# Altium PCB Glog 5G_V1.PcbDoc (part 3 of 3)
Units mil, origin at the board's own origin, x right, y up, seen from the top; angles counter-clockwise.
Board outline 2165.35 x 3838.58 mil, 4 copper layers (Top Layer, GND, PWR, Bottom Layer); 183 components, 150 nets, 767 pads, 1532 vias.
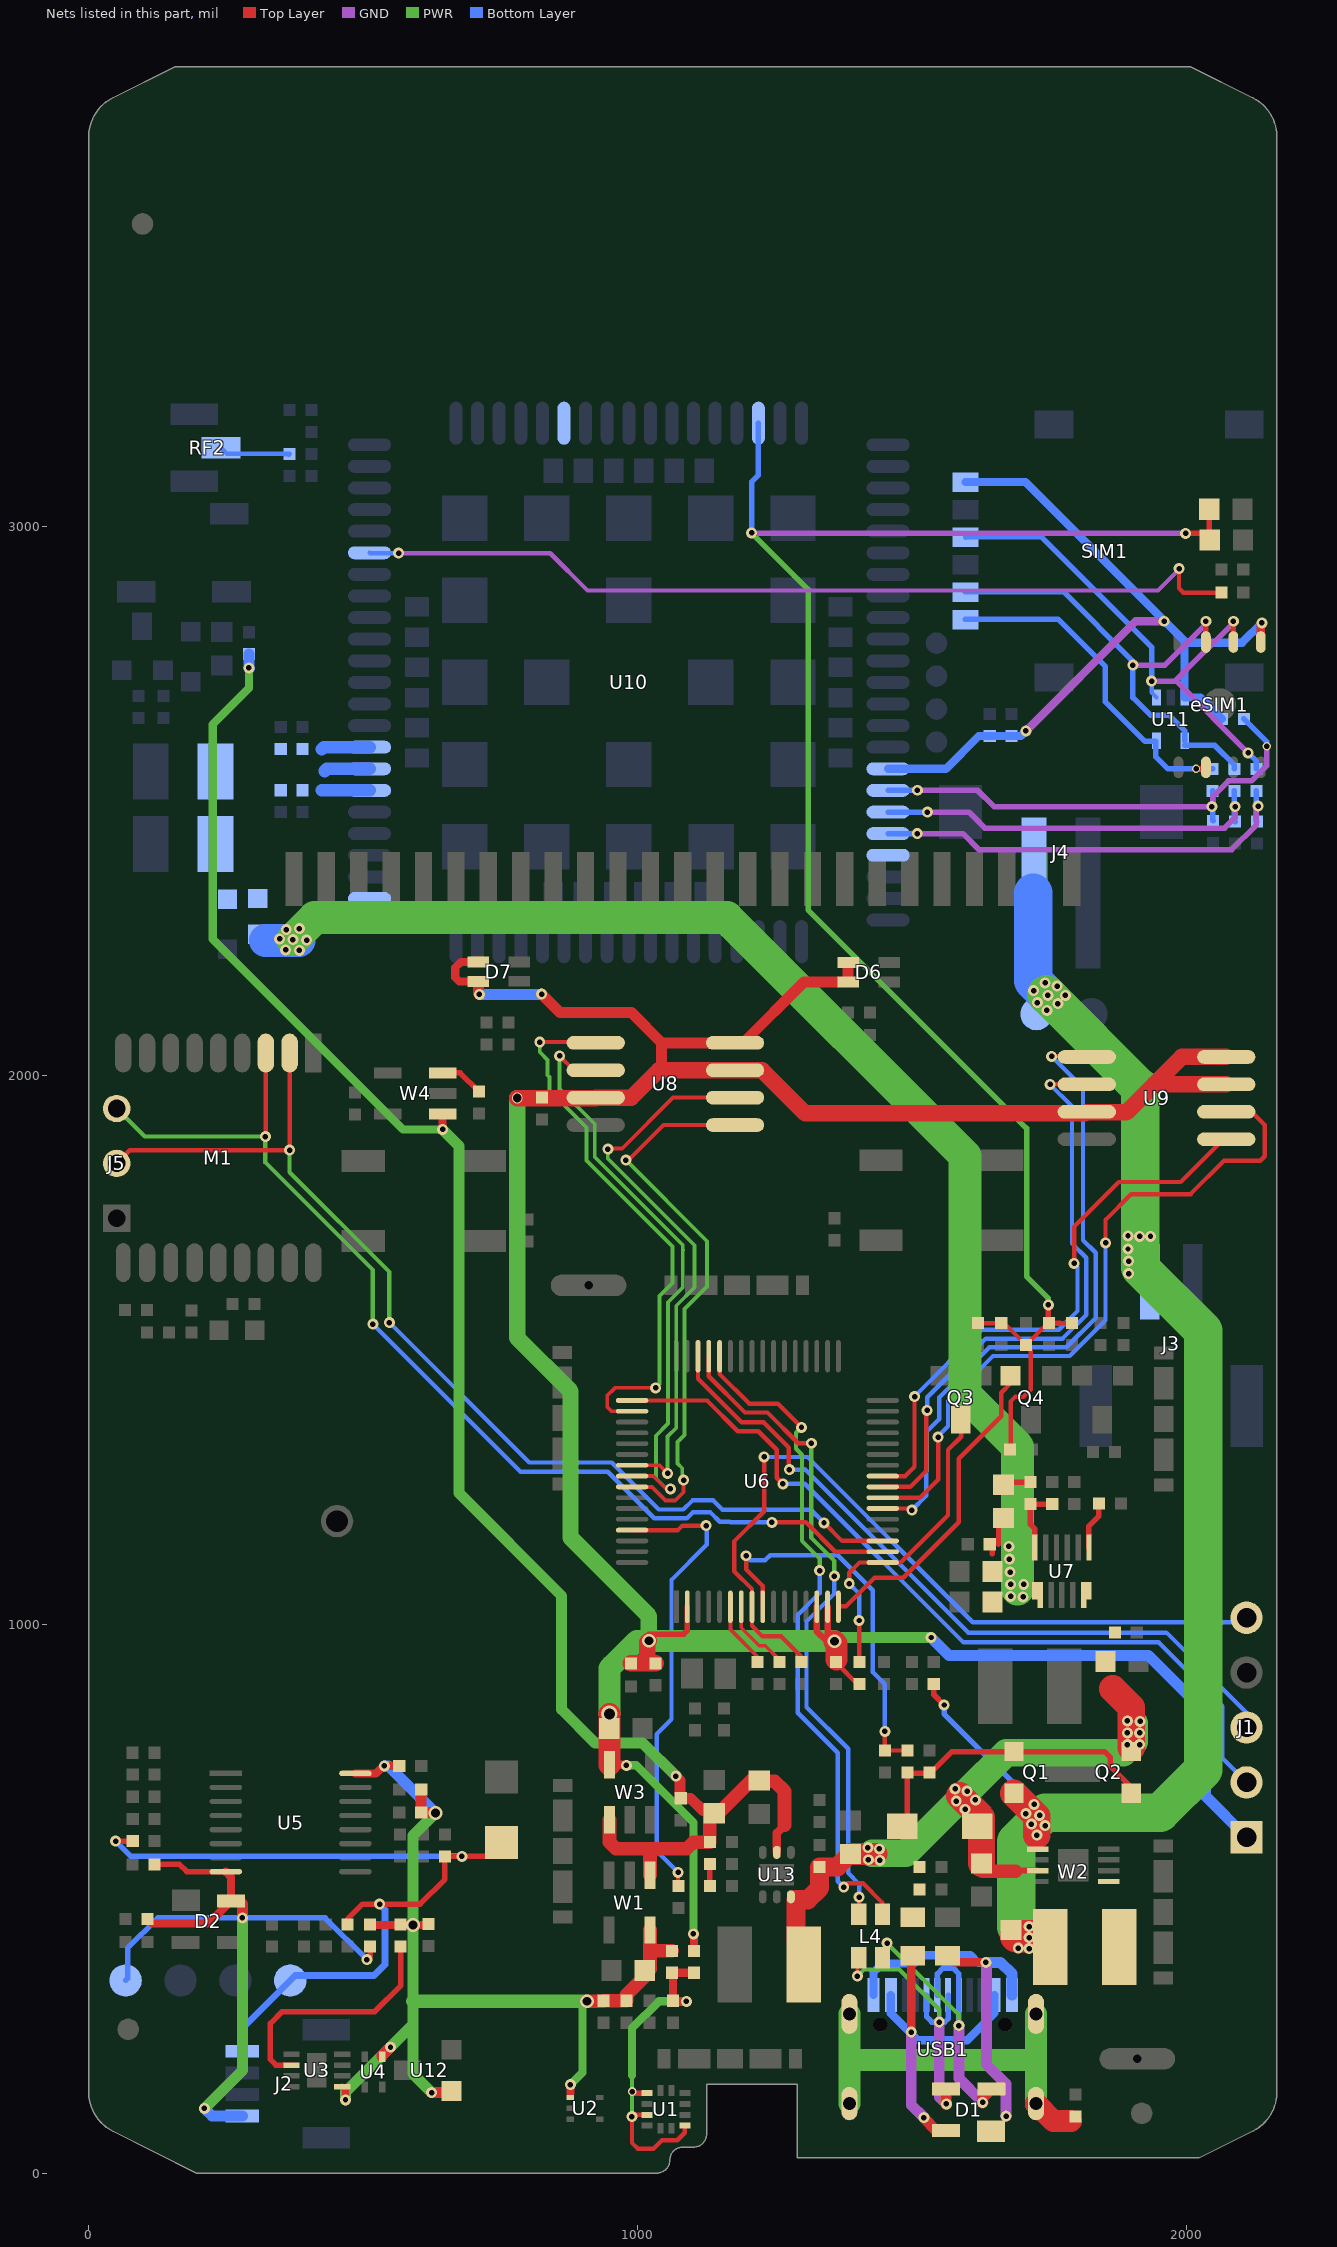
[diagram p5: the nets of this part, all layers, seen from the top]

## Via types
v1: diameter 20, hole 10, Top Layer to Bottom Layer, tented both sides, 1511 vias
v2: diameter 15, hole 10, Top Layer to Bottom Layer, tented both sides, 7 vias
v3: diameter 25, hole 16, Top Layer to Bottom Layer, tented both sides, 5 vias
v4: diameter 16, hole 10, Top Layer to Bottom Layer, tented both sides, 4 vias
v5: diameter 12, hole 10, Top Layer to Bottom Layer, tented both sides, 3 vias
v6: diameter 30, hole 20, Top Layer to Bottom Layer, tented both sides, 1 vias
v7: diameter 20, hole 16, Top Layer to Bottom Layer, tented both sides, 1 vias

## Nets (pads, with @x,y where several pads share a name; then routed paths per layer and width w, separated by ;. In a path a pad name is that pad's centre, name@x,y a point inside that pad or via, vN(x,y) a via of type N, cw(c..) or ccw(c..) an arc to the next point about the centre after c; other vN are vias at no path point) (continued)
NetR28_1: R28.1 R29.2 | length 58.9
  Top Layer w10: R28.1@1659,1254.31 1663.69,1259 R29.2@1716,1259
NetR29_1: R29.1 R30.2 U7.6 | length 122.7
  Top Layer w10: U7.6@1724.41,1139.78 1724.41,1174 1716,1182.41 R29.1@1716,1219 R30.2@1756,1219
NetR32_1: R32.1 U7.1 | length 87.7
  Top Layer w10: U7.1@1822.83,1139.78 1822.83,1178.83 1841,1197 R32.1@1841,1220
NetR40_1: R40.1 W4.3 | length 80.1
  Top Layer w10: W4.3@645,2005 677,2005 R40.1@711,1971
NetR60_2: R60.2 RF2.1 | length 146.9
  Bottom Layer w8.5: RF2.1@241,3144.02 252.02,3133 347.71,3133 ; R60.2@365,3132 cw(c365,3282) 347.71,3133 ; R60.2@366,3133 347.71,3133
NetR62_1: R62.1 U3.2 | length 446.3
  Top Layer w10: U3.2@369.56,196.85 341.15,196.85 331,207 331,273 352,294 521,294 569,342 R62.1@569,413
NetR64_1: R64.1 R65.1 | length 40
  Top Layer w10: R65.1@1132,523 1132,559 R64.1@1132,563
NRST: C30.1 J1.5 U6.8 | length 1480.2
  Top Layer w8: v1(1231,1305) 1231,1206 1176.13,1151.13 1176.13,1096.87 1208.8,1064.2 U6.8@1208.8,1032 1208.8,997.2 1228,978 1262,978 1299,941 C30.1@1299,931 ; J1.5@2106,1016 J1.5@2110,1012
  Bottom Layer w8: v1(1231,1305) 1231.13,1304.87 1310.13,1304.87 1611,1004 2102,1004 J1.5@2110,1012
PF0: R59.2 U6.6 | length 121.5
  Top Layer w7: U6.6@1169.43,1032 1169.43,990.57 1219,941 R59.2@1219,931
PF1: R26.2 U6.7 | length 136.4
  Top Layer w7: U6.7@1189.11,1032 1189.11,993.89 1222,961 1233,961 1259,935 R26.2@1259,931
PGND: C1.1 USB1.1 USB1.2 USB1.3 USB1.4 | length 857.1
  Top Layer w40: USB1.3@1726.38,126.68 1758.06,95 C1.1@1790,95
  PWR w40: USB1.4@1386.22,126.68 1386.22,209 ; USB1.2@1386.22,290.06 1386.22,209 ; USB1.3@1726.38,126.68 1726.38,206 ; USB1.1@1726.38,290.05 1726.38,206 ; 1386.22,209 1389.22,206 1726.38,206
  Bottom Layer w30: USB1.3@1726.38,126.68 1726.38,238.87
PT100_V-: J2.1 pad.10@367.35,351.06 R9.2 R12.2 R13.1 R61.1 | length 1510.4
  Top Layer w10: v1(49,605) 49.12,605.12 R12.2@80.24,605.12 ; R61.1@472,453 472,463 499,490 v1(530,490) 604,490 649,535 R13.1@649,577 v1(680,577) 726.19,577 R9.2@752,602.81
  Bottom Layer w10: v1(49,605) 77,577 v1(680,577)
  Bottom Layer w12: J2.1@280,222 280,263.71 376.29,360 520,360 540,380 540,480 v1(530,490)
SIM_CLK: eSIM1.C3 R52.2 SIM1.C3 U11.4 | length 885.6
  Top Layer w10: eSIM1.C3@2036,2790.17 v1(2036,2828)
  GND w10: v1(1903,2748) 1961,2748 2039,2826 2038,2826 v1(2036,2828)
  Bottom Layer w10: SIM1.C3@1597.73,2881.89 1776.11,2881.89 1903,2755 v1(1903,2748) ; v1@1903,2749 v1(1903,2748) ; U11.4@1997,2602 2052,2602 2088,2566 R52.2@2088,2559 ; U11.4@1997.18,2610 1997.18,2628.82 1969,2657 1935,2657 1903,2689 v1(1903,2748)
SIM_CLK_M: C44.2 R52.1 U10.32 | length 728.7
  GND w10: v1(1528.22,2480) 1604,2480 1633,2451 2070,2451 2089,2470 v1(2089,2490)
  Bottom Layer w10: U10.32@1456.69,2480.32 1527.91,2480.32 v1(1528.22,2480) ; R52.1@2088,2519 2088,2464 C44.2@2089,2463
SIM_DAT: eSIM1.C7 R53.2 SIM1.C7 U11.5 | length 636.4
  Top Layer w10: v2(2018,2559) 2033.17,2559 eSIM1.C7@2036,2561.83
  Bottom Layer w10: SIM1.C7@1597.73,2831.89 1766.11,2831.89 1852.87,2745.13 1852.87,2681.13 1925,2609 1945,2609 1945,2581 1967,2559 v2(2018,2559) R53.2@2048,2559
SIM_DAT_M: C46.2 R51.2 R53.1 U10.31 | length 902.3
  GND w10: v1(1510,2520) 1620,2520 1650,2490 2048,2490 2048,2508 2077,2537 2119,2537 2147,2565 v2(2147,2600)
  Bottom Layer w10: U10.31@1456.69,2519.69 1509.69,2519.69 v1(1510,2520) ; R53.1@2048,2519 2048,2465 C46.2@2049,2464 ; R51.2@2105,2650 2147,2608 v2(2147,2600)
  other v1: 2047,2490
SIM_DET_M: U10.34
SIM_RST: eSIM1.C2 R50.2 SIM1.C2 U11.1 | length 977.7
  Top Layer w10: eSIM1.C2@2086,2790.17 v1(2086,2828)
  GND w10: v1(1937,2719) 1980,2719 ; v1(2086,2828) 2086,2825 1980,2719 ; v1(2113,2588) 1982,2719 1980,2719
  Bottom Layer w8: SIM1.C2@1597.73,2981.89 SIM1.C2@1598.89,2981.89 ; v1(1937,2719) 1937,2698 U11.1@1946,2689
  Bottom Layer w10: SIM1.C2@1598,2981 1598.89,2981.89 1736.11,2981.89 1937,2781 v1(1937,2719) ; v1@2113,2586 v1(2113,2588) 2128,2573 2128,2571 R50.2@2128,2559
SIM_RST_M: C43.2 R50.1 U10.33 | length 792.4
  GND w10: v1(1509.95,2440.95) 1593.05,2440.95 1622,2412 2083,2412 2128,2457 v1@2128,2491
  Bottom Layer w10: U10.33@1456.69,2440.95 v1(1509.95,2440.95) ; R50.1@2128,2519 2128,2464 C43.2@2129,2463
  other v1: 2131,2491
SIM_VDD: C49.1 C50.2 eSIM1.C1 R51.1 SIM1.C1 U10.30 U11.3 | length 1513.7
  Top Layer w15: eSIM1.C1@2136,2790.17 2136,2823 v1(2138,2825)
  GND w15: v1(1708,2628) 1908,2828 v1(1960,2828)
  Bottom Layer w15: U10.30@1456.69,2559.06 1562.06,2559.06 1622,2619 C49.1@1642,2619 C50.2@1682,2619 1699,2619 v1(1708,2628) ; SIM1.C1@1597.73,3081.89 1707.11,3081.89 1997.18,2791.82 ; R51.1@2065,2650 2026,2689 U11.3@1997.18,2689 1997.18,2791.82 ; v1(2138,2825) 2102,2789 2000,2789 1997.18,2791.82
SPI0_MISO: U6.24 U9.2 | length 1093.1
  Top Layer w8: U6.24@1446.98,1250.5 1497.5,1250.5 1526,1279 1526,1388 v1(1528,1390) ; v1(1752,1984) U9.2@1819,1984
  Bottom Layer w8: v1(1528,1390) 1528,1413.9 1634.85,1520.75 1774.85,1520.75 1818,1563.9 1818,1668 1792,1694 1792,1944 v1(1752,1984)
SPI0_MOSI: U6.25 U9.5 | length 1076.9
  Top Layer w8: U6.25@1446.98,1270.19 1488.19,1270.19 1505,1287 v1(1505,1415) ; v1(1796,1658) 1796,1725 1877,1806 1990,1806 U9.5@2068,1884 ; U9.5@2045,1884 U9.5@2068,1884 ; U9.5@2072.94,1884 U9.5@2068,1884
  Bottom Layer w8: v1(1505,1415) 1626.62,1536.62 1767.62,1536.62 1802,1571 1802,1652 v1(1796,1658)
SPI0_NSS: U6.22 U9.1 | length 1201.1
  Top Layer w7: U6.22@1446.98,1211.13 1496.87,1211.13 v1(1500,1208)
  Top Layer w8: v1(1755,2035) 1818,2035 U9.1@1819,2034 ; U9.1@1851,2035 U9.1@1852,2034
  Bottom Layer w8: v1(1500,1208) 1526,1234 1526,1349.93 1550.13,1374.06 1550.13,1413.58 1641.42,1504.87 1781.42,1504.87 1835,1558.45 1835,1677 1812,1700 1812,1978 v1(1755,2035)
SPI0_SCK: U6.23 U9.6 | length 1270.6
  Top Layer w8: U6.23@1446.98,1230.82 1514.82,1230.82 1548,1264 v1(1548,1341) ; v1(1853,1695) 1853,1737 1900,1784 2008,1784 2069,1845 2135,1845 2143,1853 2143,1910 2119,1934 U9.6@2072.94,1934
  Bottom Layer w8: v1(1548,1341) v1@1549,1342 ; v1@1548,1343 1566,1361 1566,1407 1648,1489 1788,1489 1853,1554 v1(1853,1695)
SPI1_MISO: U6.56 U8.2 | length 1074.1
  Top Layer w7: v1(858,2036) 884.2,2009.8 U8.2@923.94,2009.8 ; U6.56@990.29,1270.19 1028.81,1270.19 1052,1247 v1(1060,1247)
  PWR w7: v1(858,2036) 858,1975.78 922.25,1911.53 922.25,1851.49 1082.63,1691.11 1082.63,1682.37 ; v1(1060,1247) 1052.77,1247 1033.63,1266.15 1033.63,1343.63 1055.87,1365.87 1055.87,1586.84 1082.63,1613.59 1082.63,1682.37 ; 1083,1682 1082.63,1682.37
SPI1_MOSI: U6.57 U8.5 | length 1029.4
  Top Layer w7: v1(979,1846) 984,1846 1047.8,1909.8 U8.5@1177.88,1909.8 ; U6.57@990.29,1250.5 1026.5,1250.5 1038.63,1238.37 1038.63,1238.15 1051.15,1225.63 1068.85,1225.63 1084,1240.77 v1(1084,1263)
  PWR w7: v1(979,1846) 1127,1698 1127,1615.9 1085.62,1574.52 1085.62,1345.3 1072.75,1332.43 1072.75,1293.25 1081.63,1284.37 1081.63,1265.37 v1(1084,1263)
SPI1_NSS: U6.50 U8.1 | length 1009.6
  Top Layer w7: v1(822,2061) 920.74,2061 921.74,2062 U8.1@923.94,2059.8 ; U6.50@990.29,1388.3 952.7,1388.3 945,1396 945,1417 959,1431 v1(1033,1431)
  PWR w7: v1(822,2061) 822,2043 836.37,2028.63 836.37,2000.74 839.75,1997.36 839.75,1972.99 907.37,1905.37 907.37,1845.33 1064,1688.7 1064,1622 1040.12,1598.12 1040.12,1438.12 v1(1033,1431)
SPI1_SCK: U6.55 U8.6 | length 1018.3
  Top Layer w7: v1(946,1866) 947.37,1867.37 972.37,1867.37 1064.8,1959.8 U8.6@1177.88,1959.8 ; U6.55@990.29,1289.87 1040.13,1289.87 v1(1055,1275)
  PWR w7: v1(946,1866) 946,1848.77 1104,1690.77 1104,1613.93 1070.75,1580.68 1070.75,1357.75 1055,1342 v1(1055,1275)
STATUS: R45.1 U10.66 | length 1637.6
  Top Layer w8: v1(1987,2924) 1987,2888 1995,2880 R45.1@2064,2880
  GND w8: v1(565,2952) 841,2952 909,2884 1948.75,2884 1987,2922.25 v1(1987,2924)
  Bottom Layer w8: U10.66@511.81,2952.76 512.57,2952 v1(565,2952)
SW: L1.2 W2.1
SWCLK: J1.2 U6.49 | length 1493.5
  Top Layer w8: U6.49@990.29,1407.98 1126.95,1407.98 1182.93,1352 1220,1352 1254,1318 1254,1267 v1(1265,1256)
  Bottom Layer w8: v1(1265,1256) 1305,1256 1594,967 1950,967 2066,851 2066,756 J1.2@2110,712
SWDIO: J1.3 U6.46 | length 1344.1
  Top Layer w8: U6.46@1110.37,1488.69 1110.37,1447.63 1190,1368 1230,1368 1276,1322 1276,1282 v1(1277,1282)
  Bottom Layer w8: v1(1277,1282) 1304,1282 1305,1283 1603,985 1964,985 2110,839 J1.3@2110,812
TH_PWR_EN: R10.1 U6.61 | length 849.8
  Top Layer w8: U6.61@990.29,1171.76 1073.76,1171.76 1082,1180 v1(1125,1180) ; v1(1074,548) 1074,524 R10.1@1075,523
  Bottom Layer w8: v1(1074,548) 1035,587 1035,800 1062,827 1062,1081 1126,1145 1126,1179 v1(1125,1180)
U1_RXD: J5.2 M1.2 U6.19 | length 1969
  Top Layer w8: J5.2@51,1840 75,1864 v1(366,1864) 366.14,1864.14 M1.2@366.14,2041.05 ; v1(1340,1185) 1372.92,1152.08 U6.19@1446.98,1152.08
  PWR w8: v1(366,1864) 366,1824 548,1642 v1(548,1550)
  Bottom Layer w8: v1(548,1550) 803,1295 953,1295 1038.75,1209.25 1083.64,1209.25 1100.26,1225.87 1138.13,1225.87 1155,1209 1316,1209 v1(1340,1185)
U1_TXD: J5.3 M1.3 U6.18 | length 1977.2
  Top Layer w8: v1(322,1889) 322.83,1889.83 M1.3@322.83,2041.05 ; v1(1245,1186) 1307,1186 1360.61,1132.39 U6.18@1446.98,1132.39
  PWR w8: J5.3@51,1940 102,1889 v1(322,1889) 322,1841.7 518,1645.7 v1(518,1547)
  Bottom Layer w8: v1(518,1547) 787,1278 946,1278 1030.62,1193.38 1090.21,1193.38 1100.83,1204 1133,1204 1150,1187 1168,1187 1169,1186 v1(1245,1186)
U3_RXD: Q3.C R27.2 U6.17 | length 579.3
  Top Layer w8: v1(1386,1074) 1386,1094 1404.71,1112.71 U6.17@1446.98,1112.71 1479.71,1112.71 1566,1199 1566,1318 1590,1342 Q3.C@1590,1364 ; v1(1404,1007) 1404,931 R27.2@1405,930 ; Q3.C@1589,1364 Q3.C@1589,1373
  Bottom Layer w8: v1(1386,1074) 1404,1056 v1(1404,1007)
U3_TXD: Q4.E U6.16 | length 588.8
  Top Layer w8: U6.16@1366.28,1032 U6.16@1367,1032 ; U6.16@1367,1033 1380,1033 1432,1085 1484.53,1085 1585.75,1186.22 1585.75,1301.75 1663,1379 1663,1422 1680,1439 Q4.E@1680,1453
UC_RXD: U10.96
UC_TXD: U10.95
USB_5V: C11.2 C12.2 D4.A L3.2 Q1.1 Q2.1 R1.1 R19.2 | length 573.4
  Top Layer w10: D4.A@1498,632 1492,638 R19.2@1492,730 1493,729 R1.1@1532,729 ; R1.1@1532,730 R1.1@1532,729 ; Q2.1@1900,692 1900,703 1862,741 1862,757 1851,768 Q1.1@1686,768 1573,768 1534,729 R1.1@1532,729
USB_BOOT: U10.6
USB_D+: D1.3 L4.1 USB1.A6 USB1.B6 | length 552.7
  Top Layer w8: v1(1401,359) 1401,388.28 L4.1@1403.35,390.63
  Top Layer w20: D1.3@1562.66,153.5 1562.66,125.34 1563,125 v1(1563,126)
  GND w20: v1(1550,275) 1550,139 v1(1563,126)
  PWR w8: v1(1401,359) 1413,371 1477,371 1550,298 v1(1550,275)
  Bottom Layer w10: USB1.B6@1526.78,324.49 1526.78,285 1536.78,275 v1(1550,275) 1560,275 1566.15,281.15 USB1.A6@1566.15,324.49
USB_D-: D1.2 L4.3 USB1.A7 USB1.B7 | length 607.4
  Top Layer w8: L4.3@1446.65,390.63 1446.65,400.65 1455,409 v1(1455,419)
  Top Layer w20: v1@1629.34,128.34 1629,128 v1(1629,129) 1629,137.17 D1.2@1645.34,153.5
  GND w20: v1(1585.83,268.83) 1585.83,172.17 v1(1629,129)
  PWR w8: v1(1455,419) 1585.83,288.17 v1(1585.83,268.83)
  Bottom Layer w10: USB1.A7@1546.46,324.49 1546.46,362.92 1557,373.46 1575.54,373.46 1585.83,363.17 USB1.B7@1585.83,324.49 v1(1585.83,268.83)
USB_DM: L4.4 U6.44 | length 1244.4
  Top Layer w8: U6.44@1149.74,1488.69 1149.74,1456.33 1204.07,1402 1256,1402 v1(1299,1359) ; v1(1376,521) 1383,528 1411,528 1446.65,492.35 L4.4@1446.65,469.37
  PWR w8: v1(1299,1359) 1289,1349 1289,1320 1300,1309 1300,1152 1332,1120 v1(1332,1098)
  Bottom Layer w8: v1(1332,1098) 1332,1057 1292.13,1017.13 1292.13,838.87 1365,766 1365,532 v1(1376,521)
USB_DP: L4.2 U6.45 | length 1213.3
  Top Layer w8: U6.45@1130.06,1488.69 1130.06,1451.94 1196,1386 1237,1386 1293,1330 v1(1317,1330) ; L4.2@1403.35,469.37 1404,470.02 v1(1404,503)
  PWR w8: v1(1317,1330) 1317,1157.45 1359,1115.45 v1(1359,1088)
  Bottom Layer w8: v1(1359,1088) 1359,1056 1308.13,1005.13 1308.13,849 1384,773.13 1384,547 1404,527 v1(1404,503)
USB_V+: D1.4 L3.1 USB1.A4B9 USB1.B4A9 | length 646.6
  Top Layer w15: v1(1499,257) 1499,388 L3.1@1502,391
  Top Layer w20: v1(1522,101) 1522,100 1544.09,77.91 D1.4@1562.66,77.91
  GND w20: v1(1499,257) 1499,124 v1(1522,101)
  Bottom Layer w15: USB1.B4A9@1461.81,324.49 1461.81,291.19 1511,242 1601,242 1650.79,291.79 ; 1650.79,292.79 USB1.A4B9@1650.79,324.49
USB_V-: D1.1 L2.1 USB1.A1B12 USB1.B1A12 | length 728.7
  Top Layer w15: L2.1@1565,396 1577,384 v1(1635,384)
  GND w20: v1(1635,384) 1636,383 1636,198 1672,162 v1(1672,103.94)
  Bottom Layer w15: USB1.B1A12@1430.32,324.49 1430.32,366 1446.32,382 1503,382 1518,397 1607,397 1620,384 v1@1634,384
  Bottom Layer w20: v1(1635,384) 1662,384 1682.29,363.71 USB1.A1B12@1682.29,324.49
USB_VOL: R19.1 R20.2 U6.9 | length 712.8
  Top Layer w8: v1(1198,1125) 1198,1100.55 1228.48,1070.07 U6.9@1228.48,1032 U6.9@1228,1031.52 ; v1(1451,805) R20.2@1451,770 R19.1@1492,770
  Bottom Layer w8: v1(1198,1125) 1205.87,1117.13 1233.06,1117.13 1241.93,1126 1364.93,1126 1429,1061.93 1429,913 1451,891 v1(1451,805)
V12_R: C9.2 C15.1 D2.4 J2.4 pad.10@67.35,351.06 R7.1 U5.8 | length 1441.7
  Top Layer w10: C15.1@120,562 121,563 165,563 178.82,549.18 U5.8@249.87,549.18 ; v1(507,389) 513,395 R7.1@513,413
  Top Layer w15: C9.2@107,463 115,455 218.25,455 D2.4@259.34,496.09 259.34,539.71 U5.8@249.87,549.18
  Top Layer w20: D2.4@259.34,496.09 274.34,496.09 280,490.43 v1(280,465)
  PWR w20: v1(211,118) 280,187 v1(280,465)
  Bottom Layer w10: pad.10@67.35,351.06 71,354.71 71,410 126,465 v1(280,465) 431,465 v1(507,389)
  Bottom Layer w20: v1(211,118) 225.11,103.89 J2.4@280,103.89
VBAT_BB: C45.1 C47.1 C48.1 C51.1 C52.2 C53.2 D10.1 L8.2 U10.55 U10.56 U10.57 | length 258.7
  Bottom Layer w23: 425,2520 425.31,2519.69 U10.55@511.81,2519.69 ; 425,2595 428.43,2598.43 U10.57@511.81,2598.43 ; 430,2555 434.06,2559.06 U10.56@511.81,2559.06
VCC_ADC: C3.1 C6.1 C7.1 C16.1 R2.1 R3.2 R4.2 R7.2 R15.1 R62.2 U2.1 U3.5 U4.3 U5.16 U12.B W1.5 | length 1949.2
  Top Layer w12: U3.5@462.08,157.48 468,151.56 v1(468,133.56)
  Top Layer w15: U5.16@486.09,728.32 523.32,728.32 537,742 v1(539,742) C16.1@566,742 ; R7.2@513,453 514,452 v3(591,452) 617,452 C6.1@619,454 ; 878,146 v1(878,161)
  Top Layer w20: U4.3@534.75,212.12 534.75,214.31 v1(550,229.56) ; R3.2@606,699 R4.2@606,657 631,657 v3(632,656) ; v1(625,146.56) 658,146.56 U12.B@661,149.56
  Top Layer w25: v3(908,313) C3.1@938,313 ; C3.1@938,314 R2.1@980,314 980,325 1013.31,358.31 C7.1@1013.31,369 ; C7.1@1023,371.69 1023,405 ; W1.5@1023,443 1023,405 ; R15.1@1063,405 1023,405
  PWR w15: v1(878,161) 900,183 900,305 v3(908,313)
  PWR w20: v1(468,133.56) 468,147.56 v1(550,229.56) 591,270.56 ; 591,313 591,270.56 ; 591,318 v3(591,452) 591,615 v3(632,656) ; v1(625,146.56) 591,180.56 591,270.56
  PWR w25: 591,313 v3(908,313)
  Bottom Layer w20: v1(539,742) 546,742 v3(632,656)
VCC_BAT: C8.2 J3.2 J4.2 L1.1 pad.10@1727.35,2112.06 Q1.2 R22.2 W2.5 | length 2722.1
  Top Layer w10: R22.2@1540,891 1540,872 v1(1559,853)
  Top Layer w50: Q1.2@1686,692 1728,650 v1(1728,616)
  Top Layer w60: C8.2@1691.18,431.56 L1.1@1748,431.56
  PWR w70: 1690.18,449 1690.18,604.18 1743,657 1953,657 2031,735 2031,1535 1916,1650 1916,1977.5 v1@1745.75,2147.75
  Bottom Layer w10: v1(1559,853) 1559,837 v1@1722,674
  Bottom Layer w70: J4.2@1721,2333.19 1721,2173 v1(1748,2146)
  other v1: 1714,409 1694,410 1714,429 1714,449 1743,633 1718,636 1733,652 1708,655 1723,672 1895,1639 1895,1662 1894,1684 1915,1707 1935,1707 1894,1708 1746,2119 1766,2131 1729,2133 1780,2146 1722,2155 1765,2163 1743,2169
VCC_LTE: C28.1 C29.1 C31.2 L8.1 R28.2 U7.7 | length 2380.4
  Top Layer w10: 1647,1129 C31.2@1647,1146 ; 1658,1146 1658,1184.68 R28.2@1667,1193.68
  PWR w60: v1(372,2248) 411.87,2287.87 1163.13,2287.87 1597,1854 1597,1419.5 1693,1323.5 1693,1064
  Bottom Layer w60: L8.1@322,2246 383,2246
  other v1: 1703,1050 1680,1051 1680,1073 1704,1073 1679,1095 1678,1119 1677,1142 384,2228 359,2229 397,2247 348,2249 360,2266 384,2268
VCC_MCU: C13.1 C19.1 C22.1 C41.1 D6.1 D6.2 D7.1 D7.2 J1.1 R16.1 R27.1 R58.1 U6.2 U6.14 U6.15 U8.3 U8.7 U8.8 U9.3 U9.7 U9.8 W3.5 | length 6062.8
  Top Layer w8: C19.1@1363,930 1363,928.87 1401.87,890 R27.1@1405,890
  Top Layer w10: v3@1021,982 1084,982 1090.69,988.69 U6.2@1090.69,1032
  Top Layer w12: U6.14@1326.91,1032 1326.91,987.09 1345,969 v3@1356.18,969 ; U6.15@1346.59,1032 1346.59,978.59 v3@1356.18,969 ; v3(1359,969) v3@1356.18,969
  Top Layer w15: D7.2@710,2171.72 675.28,2171.72 668,2179 668,2197 678.15,2207.15 D7.1@710,2207.15 ; W3.5@949,744 979,744 v1(980,743) ; v1@1101,438 v1@1102,437 ; v1(1102,436) v1@1102,437 ; R16.1@1103,405 1103,436 v1@1102,437
  Top Layer w20: D7.2@710,2171.72 710,2150 v1(712,2148) ; v1(825.5,2148.5) 859,2115 989,2115 1044.2,2059.8 ; 1044.2,2009.8 1044.2,2059.8 ; D6.1@1384,2206.15 D6.2@1384,2170.72 1303.72,2170.72 1192.8,2059.8 U8.8@1177.88,2059.8 1044.2,2059.8
  Top Layer w30: v7(781,1959) U8.3@923.94,1959 ; U8.3@923.94,1959.8 988.8,1959.8 1038.8,2009.8 1044.2,2009.8 U8.7@1177.88,2009.8 1227.2,2009.8 1305.87,1931.13 1816.13,1931.13 1818,1933 1891,1933 1942,1984 ; R58.1@988,929 C22.1@1033,929 ; 1018,931 1018,967 v3(1021,970) ; U9.7@2072.94,1984 1942,1984 ; U9.8@2072.94,2034 1992,2034 1942,1984
  Top Layer w40: W3.5@949,744 v6(949,837) ; v3(1359,969) 1363,965 C19.1@1363,936
  PWR w15: v1(980,743) 998,743 1102,639 v1(1102,436)
  PWR w20: v3(1359,969) 1366,976 v1(1535,976)
  PWR w30: v7(781,1959) 781,1522 878,1425 878,1158 1021,1015 v3(1021,970)
  PWR w40: v6(949,837) 949,920 999,970 v3(1021,970) 1358,970 v3(1359,969)
  Bottom Layer w20: v1(712,2148) 825,2148 v1(825.5,2148.5) ; v1(1535,976) 1568,943 1931,943 2035,839 2035,687 J1.1@2110,612
VCC_SC: C2.1 R15.2 R16.2 U1.1 U1.3 U1.7 | length 623.5
  Top Layer w8: U1.3@1017.55,106.16 993.16,106.16 v1(990,103) 990,55 1000.87,44.13 1029.13,44.13 1044.83,59.83 1072.74,59.83 1086.45,73.55 U1.7@1086.45,86.47
  Top Layer w10: v4@993.47,145.53 U1.1@1017.55,145.53
  Top Layer w15: v1(1089,313) 1066,313 C2.1@1065,314 1065,363 R15.2@1063,365 R16.2@1103,365
  PWR w8: v1(990,103) 990,178
  PWR w15: 990,178 990,264 1039,313 v1(1089,313)
  other v4: 990.47,148.53
VCC_SYS: C14.1 C59.2 R11.1 R56.2 R63.2 U13.2 W1.1 W3.1 W4.1 | length 3269.8
  Top Layer w15: v1(645,1902) W4.1@645,1930 ; U13.2@1254,584.49 1254,620 1268,634
  Top Layer w20: v1(1070,723.5) 1078,715.5 R11.1@1078,684 ; R11.1@1079,683 1097,683 1119.31,660.69 C14.1@1142,660.69
  Top Layer w25: W3.1@949,644 949,603 961,591 1023,591 ; W1.1@1023,543 1023,591 ; C14.1@1142,653.69 C14.1@1149,660.69 ; C14.1@1142,660.69 1132,650.69 C59.2@1132,603 1102,603 1090,591 1023,591 ; C14.1@1152.69,660.69 1207.32,715.32 R63.2@1222,715.32 ; R63.2@1227.37,714 1250,714 1268,696 1268,634
  PWR w15: v1(292,2743) 292,2706 226,2640 226,2249 573,1902 v1(645,1902)
  PWR w20: v1(645,1902) 675,1872 675,1239 862,1052 862,845 923,784 1009.5,784 v1(1070,723.5)
  Bottom Layer w20: R56.2@292,2768 v1(292,2743) v1@293,2742
VDD_EXT: C33.2 C34.1 C35.2 D8.1 D9.1 R33.1 R35.2 R36.2 U10.15 | length 3178.4
  Top Layer w8: R35.2@1621,1549 C33.2@1663,1549 1668,1549 C34.1@1708,1509 ; R33.1@1679,1319 1680,1320 1680,1406 1689,1415 1704,1415 1717,1428 1717,1500 C34.1@1708,1509 ; C35.2@1750,1549 1748,1549 C34.1@1708,1509 ; 1770,1549 R36.2@1792,1549
  Top Layer w10: v1(1749,1582) 1749,1550 C35.2@1750,1549 1770,1549 ; v1(1999,2988) 2038,2988 2039,2987 2042,2990 D9.1@2042,3032 D9.1@2042,3038
  GND w10: v1@1208,2991 1211,2988 v1@1998,2988 ; v1@1999,2987 v1@1998,2988 ; v1(1999,2988) v1@1998,2988
  PWR w10: v1(1208,2989) 1311,2886 1311,2302 1709.13,1903.87 1709.13,1633.87 1749,1594 v1(1749,1582)
  Bottom Layer w10: v1(1208,2989) 1208,3082 1220,3094 1220,3182 1220.47,3182.47 U10.15@1220.47,3188.98
VIN-T: C10.2 C20.1 C27.2 C61.1 D4.K L5.1 Q2.2 R66.2 U7.11 U13.6 W2.7 | length 1288.4
  Top Layer w11: 1659.44,551.03 1729.16,551.03 W2.7@1729.2,551.07
  Top Layer w25: C10.2@1628.93,550.07 1689.04,550.07
  Top Layer w35: L5.1@1303,380 1303,409 1289,423 1289,498 1310.5,498 1332,519.5 R66.2@1332,558 1364.31,558 C61.1@1388,581.69
  Top Layer w40: C61.1@1388,581.69 1436,581.69
  Top Layer w50: 1587,688 1627,648 C10.2@1627,564.32 ; 1866,883 1900,849 Q2.2@1900,775
  PWR w50: 1428,583 1489,583 v1@1582.5,676.5 ; v1@1601.5,695.5 1672,766 1885,766 1905,786 1905,820
  other v1: 1442,570 1421,571 1441,591 1420,593 1597,663 1581,678 1616,680 1601,696 1579,700 1893,781 1915,781 1893,802 1915,802 1916,823 1893,824
pads on no net: B1.3 eSIM1.C4 eSIM1.C6 eSIM1.C8 M1.4 M1.5 M1.7 M1.9 M1.13 M1.15 M1.16 M1.17 M1.18 PG1.1 PG1.2 PG1.3 PG1.4 PG1.5 SIM1.C6 U1.6 U1.10 U1.11 U3.3 U3.6 U5.3 U5.11 U5.12 U5.13 U7.3 U10.4 U10.5 U10.7 U10.8 U10.11 U10.12 U10.13 U10.14 U10.19 U10.20 U10.21 U10.25 U10.26 U10.35 U10.36 U10.37 U10.38 U10.40 U10.41 U10.42 U10.43 U10.44 U10.47 U10.48 U10.49 U10.50 U10.51 U10.53 U10.67 U10.68 U10.93 U10.97 U10.98 U10.99 U10.100 U10.101 U10.102 U10.103 U10.104 U10.105 U10.106 U10.107 U10.108 U10.109 U10.110 U10.111 U10.112 U10.113 U10.114 U10.115 U10.116 U10.117 U10.118 U10.119 U10.120 U10.121 U10.122 U10.123 U10.124 USB1. USB1.B5 USB1.B8 W1.4 W2.2@1842.49,507.21 W3.4 W4.4

## Polygon pours and split planes (outlines as drawn)
GND on Top Layer "Bottom Layer-No Net" (solid, pour order 41): 1917,337 1917,183 2165.35,183 2165.35,337
GND on Top Layer "Bottom Layer-No Net" (solid, remove dead copper, pour order 16): 765,322 765,1 1113,1 1315,203 1315,322
no net on Top Layer "Bottom Layer-No Net 2" (solid, pour order 2): 1361.23,281.42
GND on Top Layer "GND_L01_P004" (solid, remove dead copper, pour order 4): -1.94,312.06 cw(c-0.16,313.84) -2.67,313.84 -2.67,3239.17 2167.87,3239.17 2167.87,314 cw(c2165.36,314) 2167.13,312.22 2166.13,311.22 cw(c2164.35,313) 2162.58,311.22 -1.1,311.22
GND on Top Layer "Top Layer-GND" (solid, pour order 37): 188 vertices, not listed, extent 54.41,1077.81 562.79,1634.09
no net on GND "Bottom Layer-No Net" (solid, pour order 20): 1807,337 1807,183 2165.35,183 2165.35,337
GND on GND "Bottom Layer-No Net" (solid, pour order 18): 1807,337 1807,183 2165.35,183 2165.35,337
GND on GND "Bottom Layer-No Net" (solid, remove dead copper, pour order 12): 765,322 765,1 1113,1 1315,203 1315,322
GND on GND "Bottom Layer-No Net" (solid, pour order 8): -1.94,312.06 cw(c-0.16,313.84) -2.67,313.84 -2.67,3239.17 2167.87,3239.17 2167.87,314 cw(c2165.36,314) 2167.13,312.22 2166.13,311.22 cw(c2164.36,313) 2164.36,310.49 0.68,310.49 cw(c0.68,313) -1.1,311.22
GND on Bottom Layer "Bottom Layer-No Net" (solid, pour order 22): 1807,337 1807,183 2165.35,183 2165.35,337
GND on Bottom Layer "Bottom Layer-No Net" (solid, remove dead copper, pour order 14): 765,322 765,1 1113,1 1315,203 1315,322
GND on Bottom Layer "Bottom Layer-No Net" (solid, remove dead copper, pour order 10): -1.94,312.06 cw(c-0.16,313.84) -2.67,313.84 -2.67,3239.17 2167.87,3239.17 2167.87,314 cw(c2165.36,314) 2167.13,312.22 2166.13,311.22 cw(c2164.35,313) 2164.35,310.49 0.68,310.49 cw(c0.68,313) -1.1,311.22
GND on PWR "Bottom Layer-No Net" (solid, pour order 24): 1807,337 1807,183 2165.35,183 2165.35,337
GND on PWR "Bottom Layer-No Net" (solid, remove dead copper, pour order 6): -1.94,312.06 cw(c-0.16,313.84) -2.67,313.84 -2.67,3239.17 2167.87,3239.17 2167.87,314 cw(c2165.36,314) 2167.13,312.22 2166.13,311.22 cw(c2164.35,313) 2164.35,310.49 0.68,310.49 cw(c0.68,313) -1.1,311.22
GND on PWR "Bottom Layer-No Net" (solid, remove dead copper, pour order 35): 765,322 765,1 1113,1 1315,203 1315,322
no net on Bottom Overlay "GND-No Net" (solid): 32,2080 2123,2080 2123,1805 1800,1805 1800,1307 2007.97,1307 2007.97,313 1758,313 1758,370 1359,370 1359,313 32,313 32,1637 207,1637 207,1999.45 32,1999.45

## Keep-outs
Keep-Out Layer:
  circle w1: c708.66,472.44 r41.34
  circle w1: c551.18,2145.67 r41.34
  circle w1: c110.24,3700.79 r62.99
  circle w1: c2055.12,3700.79 r62.99
  circle w1: c2055.12,2204.72 r62.99
  circle w1: c110.24,2204.72 r62.99
  circle w1: c2055.12,157.48 r62.99
  circle w1: c1574.8,2145.67 r41.34
  circle w1: c110.24,157.48 r62.99
  lines w1: 2007.87,3838.58 157.48,3838.58 43.53,3781.61 ccw(c78.74,3711.18) 0,3711.18 0,147.09 ccw(c78.74,147.09) 43.53,76.66 196.85,0 1035.43,0 ccw(c1035.43,23.62) 1059.06,23.62 cw(c1082.68,23.62) 1082.68,47.24 1102.36,47.24 ccw(c1102.36,70.87) 1125.98,70.87 1125.98,161.42 1291.34,161.42 1291.34,27.56 2023.62,27.56 2121.83,76.66 ccw(c2086.61,147.09) 2165.35,147.09 2165.35,3711.18 ccw(c2086.61,3711.18) 2121.83,3781.61 2007.97,3838.53

## Other copper
Top Layer:
  rectangle net NetC59_1: 1171,575 1234,643
  rectangle net VIN-T: 1601,542 1657,656
  rectangle net GND: 1541,450 1579,573
  rectangle net GND: 1773,587 1821,653
  rectangle net GND: 1541,483 1703,523
  rectangle net GND: 1661,494 1735,521
  rectangle net GND: 1710,495 1822,536
  rectangle net GND: 1608,493.32 1723,522
  rectangle net VIN-T: 1681,546 1735,556
  rectangle net USB_5V: 1484,450 1523,655
  rectangle net SW: 1839,326 1895,536
  rectangle net VCC_BAT: 1710.44,586 1748.44,622
  rectangle net NetL6_2: 1748,998 1759,1058
  rectangle net NetL6_1: 1788,941 1799,1052
  rectangle net VCC_LTE: 1629,1030 1739,1083
  rectangle net VCC_LTE: 1633,1062 1694,1153
  rectangle net VIN-T: 1808,1030 1881,1076
  rectangle net NetL6_1: 1777,952 1809,1020
  rectangle net VIN-T: 1835,852 1881,1073
  rectangle net GND: 1544,456 1645,517
  pour cut-out: 80,1568.5 80,1638 132,1638 132,1568.5
  pour cut-out: 1133,471 1342.2,471 1342.2,293.93 1133,294.15
  pour cut-out: 223.22,311.22 223.22,376.78 812.22,376.78 814,375 814,-5 232,-5 222,-15
  pour cut-out: 1835,799 1607,799 1607,962 1835,962
  pour cut-out: 1715,495 1918.2,495 1918.2,297.91 1715,298.12
  pour cut-out: 1193,954 1193,869 1068.72,869 1068.72,954
  pour cut-out: 259,1504 327.87,1504 327.87,1603 259,1603
  pour cut-out: 1342.37,456.77 1343.14,456 1653.01,456 1713.3,395.71 1713.3,281.7 1702,293 1341,293
GND:
  pour cut-out: 1331,456 1653.01,456 1713.3,395.71 1713.3,281.7 1702,293 1331,293
PWR:
  pour cut-out: 1341.78,456 1653.01,456 1713.3,395.71 1713.3,281.7 1702,293 1341.78,293
Bottom Layer:
  region net VCC_BAT: 1951,1628 1951,1723 1882,1723 1882,1628
  region net GND: 242.96,3239 22.49,3239 22.49,3481.96 242.96,3481.96
  region net GND: 648.47,3357.94 1089.42,3357.94 1089.42,3292.98 601.23,3292.98 601.23,3239 542.17,3239 542.17,3292.98 498.87,3292.98 498.87,3403.22 648.47,3403.22
  region net ANT1: 1896.5,3537.47 2147.14,3537.47 2147.14,3472.12 1041.39,3472.12 1041.39,3537.47 1522.49,3537.47 1522.49,3722.12 534.3,3722.12 534.3,3651.21 1282.33,3651.21 1282.33,3560.7 467.37,3560.7 467.37,3285.11 428,3285.11 428,3239 376.82,3239 376.82,3285.11 309.89,3285.11 309.89,3481.96 376.82,3481.96 376.82,3816.6 1896.5,3816.6
  pour cut-out: 34,3062 306,3062 306,2826 34,2826
  pour cut-out: 291,3179 146,3179 146,3107 358.86,3107 358.86,3159 291,3159
  region net VBAT_BB: 196.84,2336.16 229,2304 333,2304 333,2365 307,2391 307,2568 196.84,2568
  region net VBAT_BB: 196.85,2610 196.85,2505 310,2505 460,2505 460,2609 459,2610 221,2610
  pour cut-out: 1342.37,456.77 1343.14,456 1653.01,456 1713.3,395.71 1713.3,281.7 1702,293 1341,293

## Silkscreen, mask and mechanical layers (free items; w line width, h text height)
Top Overlay:
  circle w3: c110.24,157.48 r82.68
  circle w3: c2055.12,157.48 r82.68
  circle w3: c2055.12,2204.72 r82.68
  circle w3: c110.24,2204.72 r82.68
  circle w3: c2055.12,3700.79 r82.68
  circle w3: c110.24,3700.79 r82.68
  lines w4: 347,118.11 347,255.91 689,255.91 689,118.11 347,118.11 ; 366,383 539,383 539,539 366,539 366,383
  lines w5: 1123,345 1123,323 1158,288 1158,258 1164,252 1304,252 ; 1651.53,3433.59 1651.53,3408 1676.14,3408 ; 1652.52,3581.23 1652.52,3605.83 1678.11,3605.83 ; 1824.76,3408 1850.35,3408 1850.35,3432.61 ; 1825.75,3606.82 1850.35,3606.82 1850.35,3581.23
  lines w8: 225.98,0 225.98,374.02 808.66,374.02 808.66,0
  text "RST" at 2048,996 h25 r90
  text "GND" at 2046,903 h25 r90
  text "DIO" at 2047,788 h25 r90
  text "CLK" at 2045,676 h25 r90
  text "VCC" at 2051,569 h25 r90
Bottom Overlay:
  circle w3: c708.66,472.44 r74.8
  circle w3: c551.18,2145.67 r74.8
  circle w3: c1574.8,2145.67 r74.8
  circle w3: c110.24,157.48 r122.05
  circle w3: c2055.12,157.48 r122.05
  circle w3: c2055.12,2204.72 r122.05
  circle w3: c2055.12,3700.79 r122.05
  circle w3: c110.24,3700.79 r122.05
  circle w5: c367.35,351.06 r39.37
  circle w5: c267.35,351.06 r39.37
  circle w5: c167.35,351.06 r39.37
  circle w5: c67.35,351.06 r39.37
  pour cut-out: 36,443 423,443 423,315 420.99,312.99 34.45,312.99
  lines w5: 34.45,312.99 2120.9,312.99 2120.9,2077.76 34.45,2077.76 34.45,312.99
  text "Glog 5G_V1.5-20240320" at 1544,3568 h100
  text "( LxW: 97.5x55mm, H: 1.6mm )" at 1554,3464 h80
  text "Vbus" at 1500,2763 h30 r270
  text "GND" at 1500,2700 h30 r270
  text "DP" at 1500,2654 h30 r270
  text "DM" at 1500,2589 h30 r270
  text "-" at 1890,2236 h118.11
  text "+" at 1672,2226 h118.11
  text "V-" at 1897,2095 h30
  text "V+" at 1685,2094 h30
  text "MCU" at 201,1952 h50
  text "TXD" at 192,1918 h50
  text "RXD" at 195,1825 h50
  text "-" at 2000,1736 h100
  text "+" at 1893,1729 h100
  text "GND" at 201,1726 h50
  text "RST" at 2063,1040 h25 r90
  text "GND" at 2060,944 h25 r90
  text "DIO" at 2060,842 h25 r90
  text "CLK" at 2060,741 h25 r90
  text "VCC" at 2063,643 h25 r90
  text "PT100-" at 355,398 h30
  text "PT100+" at 162,395 h30
  text "1-黑/GND" at 659,209 h40
  text "2-绿/SCL" at 659,176 h40
  text "3-黄/SDA" at 658,145 h40
  text "4-红/VCC" at 658,113 h40
Top Solder:
  lines w27.56: 863.76,754.17 863.76,1218 ; 1958.24,635 1958.24,1200
Mechanical 2:
  drawing of 306 lines, arcs and shapes, not listed
Mechanical 15:
  circle w3: c110.24,2204.72 r122.05
  lines w0.5: 20.35,3239.12 240.82,3239.12 240.82,3616.4 ccw(c229.01,3616.4) 219.38,3623.24 cw(c110.24,3700.74) 110.24,3566.88 20.35,3566.88 20.35,3239.12 ; 307.75,3285.23 307.75,3482.08 374.68,3482.08 374.68,3816.73 1894.36,3816.73 1894.36,3537.59 2145.01,3537.59 2145.01,3472.24 1039.25,3472.24 1039.25,3537.59 1520.35,3537.59 1520.35,3722.24 532.16,3722.24 532.16,3651.33 1425.86,3651.33 1425.86,3560.82 465.23,3560.82 465.23,3285.23 425.86,3285.23 425.86,3246.5 374.68,3246.5 374.68,3285.23 307.75,3285.23 ; 496.73,3293.11 540.03,3293.11 540.03,3239.12 599.09,3239.12 599.09,3293.11 1280.19,3293.11 1280.19,3358.07 646.33,3358.07 646.33,3403.34 496.73,3403.34 496.73,3293.11
  lines w5: 2164.35,313 0.68,313 -0.16,313.84 -0.16,3239.17 2165.35,3239.17 2165.35,314

## Dimensions
34.45,2077.76 to 34.45,312.99 on Mechanical 15

## Text inside footprints (layer, text, board x,y; h text height)
D6: Top Overlay "+" at 1340.34,2176 h40
D7: Top Overlay "+" at 666.34,2177 h40
PG1: Top Overlay "25" at 1828.68,2344.43 h50; Top Overlay "1" at 321.68,2343.43 h50
SIM1: Bottom Overlay "LOCK" at 2004.27,2755.39 h25; Bottom Overlay "OPEN" at 2004.27,3135.39 h25